# Altium PCB CAMERA-ESP32.PcbDoc
Units mil, origin at the board's own origin, x right, y up, seen from the top; angles counter-clockwise.
Board outline 1605 x 1090 mil, 2 copper layers (Top Layer, Bottom Layer); 35 components, 36 nets, 167 pads, 23 vias.
Unrouted connection lines stored in the file: 3.
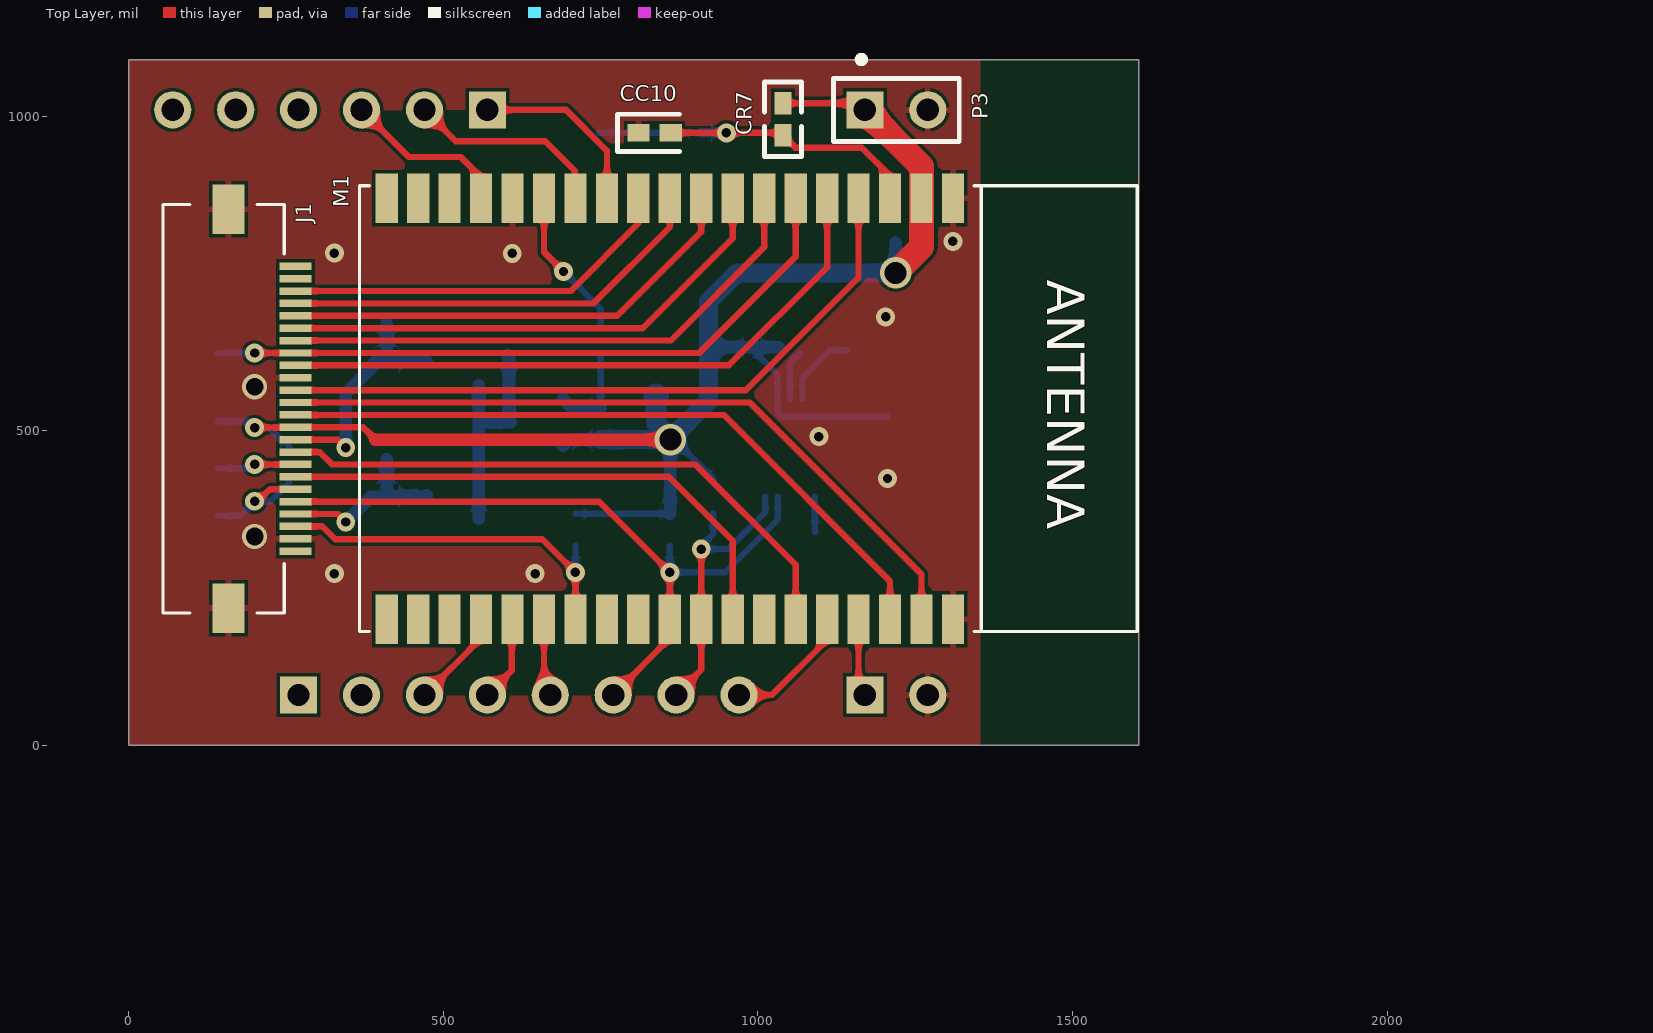
[diagram p0: Top Layer view]
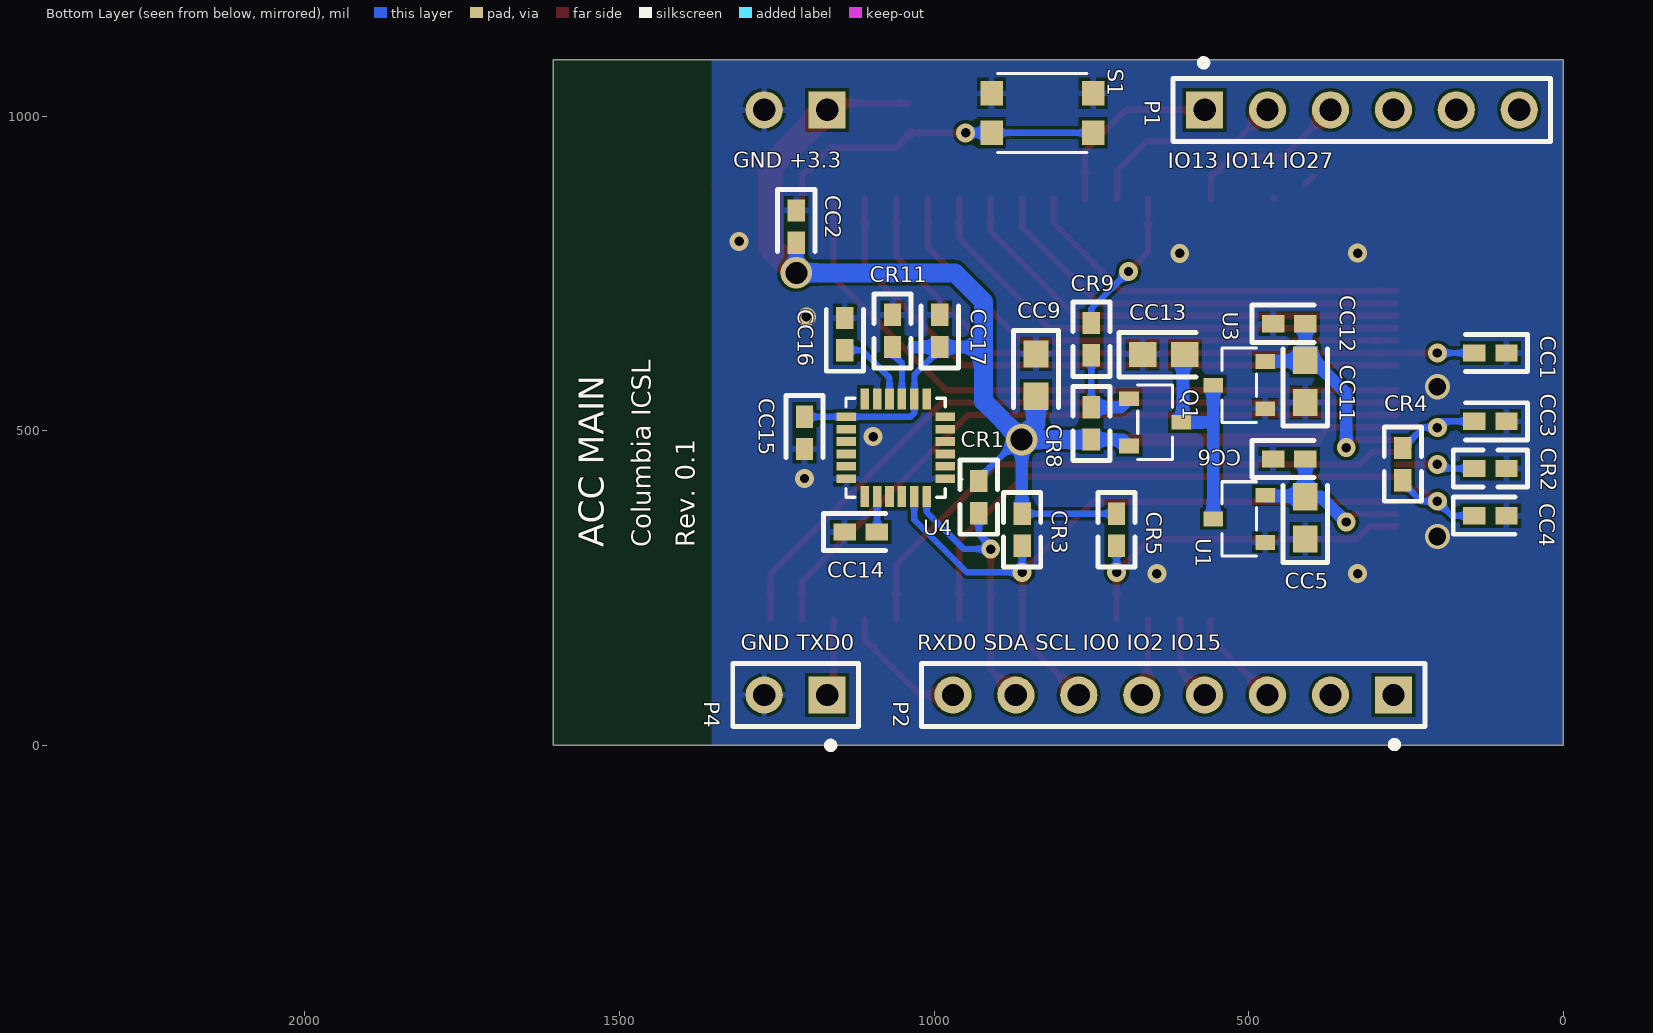
[diagram p1: Bottom Layer view, seen from below]

## Layer stack, top to bottom
Top Solder: solder mask 0.4, Solder Resist, Dk 3.5
Top Layer: signal copper 1.4
Dielectric 1: dielectric 12.6, FR-4, Dk 4.8
Bottom Layer: signal copper 1.4
Bottom Solder: solder mask 0.4, Solder Resist, Dk 3.5

## Board outline
0,0 1605,0 1605,1090 0,1090

## Design rules (kind name [scope] priority, off if disabled: settings)
Clearance [All] p1: gap=5 ignorepadtopadclearanceinfootprint=FALSE
PolygonConnect [All] p1: connectstyle=Relief reliefconductorwidth=10 reliefentries=4 polygonreliefangle="90 Angle" airgapwidth=5
RoutingVias [All] p1: holewidth=15 width=30 viastyle="Through Hole" minholewidth=15 minwidth=30 maxholewidth=40 maxwidth=60
SolderMaskExpansion [All] p1: expansion=4
Width [All] p1: maxlimit=40 minlimit=10 preferedwidth=20
30 further rules are at their usual default settings.

## Components (designator, comment, footprint, x,y, rotation, side; value= is the part's Value field where it differs from the comment)
CC1 "Cap Chip 0402" CC1005-0402 115.83,623.58 r0 bottom value=15pF
CC2 "Cap Chip 0402" CC1005-0402 1219,824.59 r270 bottom value=0.1uF
CC3 "Cap Chip 0402" CC1005-0402 115.83,515 r0 bottom value=0.1uF
CC4 "Cap Chip 0402" CC1005-0402 115.83,365 r180 bottom value=0.1uF
CC5 "Cap Chip 0603" CC1608-0603 410,361.54 r90 bottom value=10uF
CC6 "Cap Chip 0402" CC1005-0402 435.59,455 r180 bottom value=0.1uF
CC9 "Cap Chip 0603" CC1608-0603 838,588.46 r270 bottom value=10uF
CC10 "Cap Chip 0402" CC1005-0402 835.75,973.5 r0 top value=0.1uF
CC11 "Cap Chip 0603" CC1608-0603 410,578.46 r90 bottom value=10uF
CC12 "Cap Chip 0402" CC1005-0402 435.59,670 r180 bottom value=0.1uF
CC13 "Cap Chip 0603" CC1608-0603 635,621 r180 bottom value=10uF
CC14 "Cap Chip 0402" CC1005-0402 1116.59,339 r180 bottom value=2.2nF
CC15 "Cap Chip 0402" CC1005-0402 1206,496.62 r270 bottom value=0.1uF
CC16 "Cap Chip 0402" CC1005-0402 1141.83,653.59 r90 bottom value=0.1uF
CC17 "Cap Chip 0402" CC1005-0402 991,658.59 r90 bottom value=10nF
CR1 "Resistor Chip 0402" CR1005-0402 929,394.59 r90 bottom value=4.7K
CR2 "Resistor Chip 0402" CR1005-0402 115.83,440 r0 bottom value=1K
CR3 "Resistor Chip 0402" CR1005-0402 860,342.59 r270 bottom value=4.7K
CR4 "Resistor Chip 0402" CR1005-0402 255,447 r270 bottom value=4.7K
CR5 "Resistor Chip 0402" CR1005-0402 710,342.59 r270 bottom value=4.7K
CR7 "Resistor Chip 0402" CR1005-0402 1040,995 r90 top value=10K
CR8 "Resistor Chip 0402" CR1005-0402 750,511.59 r270 bottom value=10K
CR9 "Resistor Chip 0402" CR1005-0402 750,645.59 r270 bottom value=1K
CR11 "Resistor Chip 0402" CR1005-0402 1066,658.59 r90 bottom value=4.7K
J1 "CAM-FPC-CONNECTOR" CAM-CONNECTOR 239.41,535 r270 top
M1 "ESP32-WROVER-NO-PAD" ESP32-WROVER-NO-PAD 1354.88,535 r270 top
P1 "Header 6" HDR1X6 570,1010 r180 bottom
P2 "Header 8" HDR1X8 270,80 r0 bottom
P3 "Header 2" HDR1X2 1170,1010 r0 top
P4 "Header 2" HDR1X2 1170,80 r0 bottom
Q1 "P-MOS" PCBComponent_1 650.63,513.4 r270 bottom
S1 "KMR-6-SWITCH" KMR-6-SWITCH 827.87,1005 r0 bottom
U1 "XC6206-2.8V" XC6206-SOT-23 515,360 r90 bottom
U3 "XC6206-1.2V" XC6206-SOT-23 515,572.4 r90 bottom
U4 "MPU6050" MPU-6050 1061,473 r0 bottom

## Footprints (in the part's own frame and the unit in brackets; to place one, negate y for a bottom-side part, rotate by r counter-clockwise, add the part's x,y. Pads: shape width x height; smd on the part's side, far side on the other; paste and mask are expansions set on the pad)
CAM-CONNECTOR [mm]
  rect 0.3x1.3 smd: 1(-5.75,0.65) 2(-5.25,0.65) 3(-4.75,0.65) 4(-4.25,0.65) 5(-3.75,0.65) 6(-3.25,0.65) 7(-2.75,0.65) 8(-2.25,0.65) 9(-1.75,0.65) 10(-1.25,0.65) 11(-0.75,0.65) 12(-0.25,0.65) 13(0.25,0.65) 14(0.75,0.65) 15(1.25,0.65) 16(1.75,0.65) 17(2.25,0.65) 18(2.75,0.65) 19(3.25,0.65) 20(3.75,0.65) 21(4.25,0.65) 22(4.75,0.65) 23(5.25,0.65) 24(5.75,0.65)
  rect 2x1.3 smd: 25(-8.05,-2.05) 26(8.05,-2.05)
  silkscreen extent -8.25,-4.7 8.25,0.2
CC1005-0402 [mm]
  rect 0.9x0.7 smd: 1(-0.65,0) 2(0.65,0)
  silkscreen extent -1.5,-0.75 1,0.75, body extent -0.5,-0.25 0.5,0.25, height 0.3
CC1608-0603 [mm]
  rect 1.1x1 smd: 1(-0.85,0) 2(0.85,0)
  silkscreen extent -1.8,-0.9 1.3,0.9, body extent -0.8,-0.4 0.8,0.4, height 0.3
CR1005-0402 [mm]
  rect 0.9x0.7 smd: 1(-0.65,0) 2(0.65,0)
  silkscreen extent -1.5,-0.75 1.5,0.75, body extent -0.5,-0.25 0.5,0.25, height 0.35
ESP32-WROVER-NO-PAD [mm]
  rect 2x0.9 smd: 1(-8.5,-1.14) 2(-8.5,-2.41) 3(-8.5,-3.68) 4(-8.5,-4.95) 5(-8.5,-6.22) 6(-8.5,-7.49) 7(-8.5,-8.76) 8(-8.5,-10.03) 9(-8.5,-11.3) 10(-8.5,-12.57) 11(-8.5,-13.84) 12(-8.5,-15.11) 13(-8.5,-16.38) 14(-8.5,-17.65) 15(-8.5,-18.92) 16(-8.5,-20.19) 17(-8.5,-21.46) 18(-8.5,-22.73) 19(-8.5,-24) 20(8.5,-24) 21(8.5,-22.73) 22(8.5,-21.46) 23(8.5,-20.19) 24(8.5,-18.92) 25(8.5,-17.65) 26(8.5,-16.38) 27(8.5,-15.11) 28(8.5,-13.84) 29(8.5,-12.57) 30(8.5,-11.3) 31(8.5,-10.03) 32(8.5,-8.76) 33(8.5,-7.49) 34(8.5,-6.22) 35(8.5,-4.95) 36(8.5,-3.68) 37(8.5,-2.41) 38(8.5,-1.14)
  silkscreen extent -9,-25.1 9,6.3
HDR1X2 [mm] "Connector; Header; 2 Position"
  rect 1.5x1.5 hole 0.9: 1(0,0)
  round 1.5 hole 0.9: 2(2.54,0)
  silkscreen extent -1.27,-1.27 3.81,2.17, body extent -1.27,-1.27 3.81,1.27, height 8.54
HDR1X6 [mm] "Connector; Header; 6 Position"
  rect 1.5x1.5 hole 0.9: 1(0,0)
  round 1.5 hole 0.9: 2(2.54,0) 3(5.08,0) 4(7.62,0) 5(10.16,0) 6(12.7,0)
  silkscreen extent -1.27,-1.27 13.97,2.04, body extent -1.27,-1.27 13.97,1.27, height 8.54
HDR1X8 [mm] "Connector; Header; 8 Position"
  rect 1.5x1.5 hole 0.9: 1(0,0)
  round 1.5 hole 0.9: 2(2.54,0) 3(5.08,0) 4(7.62,0) 5(10.16,0) 6(12.7,0) 7(15.24,0) 8(17.78,0)
  silkscreen extent -1.27,-1.27 19.05,2.14, body extent -1.27,-1.27 19.05,1.27, height 8.54
KMR-6-SWITCH [mm]
  rect 0.9x1 smd: 1(-2.05,0.8) 1(2.05,0.8) 2(-2.05,-0.8) 2(2.05,-0.8)
  silkscreen extent -1.8,-1.6 1.8,1.6
MPU-6050 [mm]
  rect 0.8x0.35 smd: 1(-2,1.25) 2(-2,0.75) 3(-2,0.25) 4(-2,-0.25) 5(-2,-0.75) 6(-2,-1.25) 13(2,-1.25) 14(2,-0.75) 15(2,-0.25) 16(2,0.25) 17(2,0.75) 18(2,1.25)
  rect 0.35x0.85 smd: 7(-1.25,-1.975) 8(-0.75,-1.975) 9(-0.25,-1.975) 10(0.25,-1.975) 11(0.75,-1.975) 12(1.25,-1.975) 19(1.25,1.975) 20(0.75,1.975) 21(0.25,1.975) 22(-0.25,1.975) 23(-0.75,1.975) 24(-1.25,1.975)
  silkscreen extent -2.68,-2 2,2
PCBComponent_1 [mm]
  rect 0.6x0.8 smd: 1(-0.95,-1) 2(0.95,-1) 3(0,1.1)
  silkscreen extent -1.5,-0.65 1.5,0.75
XC6206-SOT-23 [mm]
  rect 0.6x0.8 smd: 1(-0.95,-1.05) 2(0.95,-1.05) 3(0,1.05)
  silkscreen extent -1.5,-0.7 1.5,0.7

## Part data
CC1 CC2 CC3 CC4 CC5 CC6 CC9 CC10 CC11 CC12 CC13 CC14 CC15 CC16 CC17: "Polarized Capacitor (Radial)", Published=8-Jun-2000, Publisher="Altium Limited", Revision="July-2002: Re-released for DXP Platform."
CR1 CR2 CR3 CR4 CR5 CR7 CR8 CR9 CR11: "Resistor", Published=8-Jun-2000, Publisher="Altium Limited", Revision="July-2002: Re-released for DXP Platform."
P1: "Header, 6-Pin", LatestRevisionDate=17-Jul-2002, LatestRevisionNote="Re-released for DXP Platform.", Publisher="Altium Limited"
P2: "Header, 8-Pin", LatestRevisionDate=17-Jul-2002, LatestRevisionNote="Re-released for DXP Platform.", Publisher="Altium Limited"
P3 P4: "Header, 2-Pin", LatestRevisionDate=17-Jul-2002, LatestRevisionNote="Re-released for DXP Platform.", Publisher="Altium Limited"
U1 U3: library part XC6206

## Via types
v1: diameter 30, hole 15, Top Layer to Bottom Layer, 19 vias
v2: diameter 50, hole 35, Top Layer to Bottom Layer, 2 vias
v3: diameter 40, hole 28, Top Layer to Bottom Layer, 2 vias

## Nets (pads, with @x,y where several pads share a name; then routed paths per layer and width w, separated by ;. In a path a pad name is that pad's centre, name@x,y a point inside that pad or via, vN(x,y) a via of type N, cw(c..) or ccw(c..) an arc to the next point about the centre after c; other vN are vias at no path point)
+1.2: CC11.2 CC12.2 J1.15 U3.2 | length 382.4
  Top Layer w10: J1.15@265.79,485 J1.15 332.32,485.79 v1(345,473.11)
  Bottom Layer w20: v1(345,473.11) 345,560 396.93,611.93 CC11.2 ; CC12.2 CC11.2 ; U3.2 472.6,610.87 411.06,610.87 CC11.2
+2.8: CC5.2 CC6.2 J1.21 U1.2 | length 291.5
  Top Layer w10: J1.21 332.32,367.68 v1(345,355)
  Bottom Layer w20: v1(345,355) 385,395 CC5.2 ; CC6.2 CC5.2 ; U1.2 472.46,396.2 411.2,396.2 CC5.2
+3.3: CC2.2 CC3.2 CC9.2 CC15.1 CC17.1 CR1.2 CR3.1 CR4.1 CR5.1 CR7.2 CR8.2 J1.14 M1.2 P3.1 Q1.2 U4.8 U4.13 | length 2893.9
  Top Layer w10: v1@200.24,505.24 264.76,505.24 J1.14 372.53,505.47 392.21,485.79 ; CR7.2 P3.1@1157.87,1020.59
  Top Layer w20: 392.21,485.79 v2@860.76,485.79
  Top Layer w35: P3.1@1157.87,1020.59 1168.46,1010 P3.1
  Top Layer w40: P3.1 1260,920 M1.2 1260,792 v2(1219,751)
  Bottom Layer w10: CC3.2 190,515 v1(200,505) ; v1@203.83,501.17 v1(200,505) ; CR4.1 255,476.53 246.22,485.31 242.28,485.31 222.59,505 v1(200,505) ; CR5.1 CR3.1 ; v2(860.76,486) 867.12,486 929,424.12 CR1.2 ; CC17.1 991,629.06 1031.24,588.83 1031.24,550.99 U4.8 1031.47,528.07 1037.33,522.21 U4.13 CC15.1
  Bottom Layer w20: Q1.2 700,486 CR8.2 ; CR3.1 860.38,368.56 860.38,485.62 v2(860.76,486) ; 921.31,633 CC17.1 1033,633 ; v2(1219,751) CC2.2
  Bottom Layer w30: CR8.2 v2(860.76,486) 921.31,546.55 921.31,633 921.31,705.31 967,751 v2(1219,751) ; CC9.2@838.31,554.69 838.31,511.15 v2@860.76,488.71
  Bottom Layer w40: CC9.2 CC9.2@838.31,554.69 ; v2(860.76,486) v2@860.76,488.71
GND: CC1.1 CC2.1 CC3.1 CC4.2 CC5.1 CC6.1 CC9.1 CC10.1 CC11.1 CC12.1 CC13.1 CC14.1 CC15.2 CC16.2 CC17.2 CR2.1 CR11.2 J1.10 J1.23 J1.25 J1.26 M1.1 M1.15 M1.38 P3.2 P4.2 S1.2 U1.1 U3.1 U4.1 U4.11 U4.18
  other v1: 327,273 646,273 1206,424.12 1097,490.58 1203,681 327,782.25 609.55,782 1310,801
  other v3: 200.16,332 200.16,570
NetCC1_2: CC1.2 J1.8 M1.6 | length 1074.8
  Top Layer w10: v1(200,623.58) J1.8 906.58,623.58 1060,777 M1.6
  Bottom Layer w10: CC1.2 v1(200,623.58)
NetCC4_1: CC4.1 CR4.2 J1.19 | length 212.1
  Top Layer w10: v1(200,388) 205.36,388 224.41,407.05 J1.19
  Bottom Layer w10: CC4.1 177,365 v1(200,388) 225.53,388 255,417.47 CR4.2
NetCC10_2: CC10.2 CR7.1 M1.3 S1.1 | length 615.2
  Top Layer w10: CC10.2 v1(950,973.5) CR7.1@1035.91,973.5 ; CR7.1 1059.41,950 1165,950 1210,905 M1.3
  Top Layer w15: CR7.1@1035.91,973.5 CR7.1
  Bottom Layer w10: S1.1@747.17,973.5 S1.1@908.58,973.5
  Bottom Layer w15: S1.1@908.58,973.5 v1(950,973.5)
NetCC13_2: CC13.2 Q1.3 U1.3 U3.3 | length 372.9
  Bottom Layer w20: U1.3 556.34,532.4 U3.3 ; 556.34,513.4 Q1.3@606.24,513.4 ; CC13.2 604.43,618.11 604.43,515.21 Q1.3@606.24,513.4 ; Q1.3 Q1.3@606.24,513.4
NetCC14_2: CC14.2 U4.20 | length 56.4
  Bottom Layer w10: U4.20 1090.53,339.47 CC14.2
NetCC16_1: CC16.1 U4.10 | length 122.7
  Bottom Layer w10: U4.10 1070.84,584.45 1114.39,628 CC16.1
NetCR1_1: CR1.1 M1.30 P2.7 U4.24 | length 464
  Top Layer w10: P2.7 910,120 M1.30 v1(910,312)
  Bottom Layer w10: CR1.1 928.87,368.87 928.87,335.55 910,316.68 v1(910,312) 953,312 1011.79,370.79 U4.24
NetCR2_2: CR2.2 J1.17 | length 126.2
  Top Layer w10: v1(200,446.42) J1.17
  Bottom Layer w10: CR2.2 193.58,440 v1(200,446.42)
NetCR3_2: CR3.2 J1.20 M1.29 P2.6 U4.23 | length 1158.6
  Top Layer w10: J1.20 747.64,387.36 v1(860,275) M1.29 860,170 P2.6
  Bottom Layer w10: CR3.2 v1(860,275) 948,275 1031.47,358.47 U4.23
NetCR5_2: CR5.2 J1.22 M1.26 | length 591.9
  Top Layer w10: J1.22 307.63,347.99 328.07,327.56 657.44,327.56 v1(710,275) M1.26
  Bottom Layer w10: v1(710,275) CR5.2
NetCR8_1: CR8.1 CR9.2 Q1.1 | length 148.5
  Bottom Layer w10: CR8.1 CR9.2
  Bottom Layer w20: Q1.1 703.62,537.18 CR8.1
NetCR9_1: CR9.1 M1.14 | length 235.7
  Top Layer w10: M1.14 660,784.12 v1(691,753.12)
  Bottom Layer w10: v1(691,753.12) 750,694.12 CR9.1
NetCR11_1: CR11.1 U4.9 | length 78.7
  Bottom Layer w10: U4.9 1051.16,607.33 CR11.1@1066.83,623
NetJ1_3: J1.3 M1.11 | length 629.6
  Top Layer w10: J1.3 702.38,722.01 810,829.63 M1.11
NetJ1_4: J1.4 M1.10 | length 691.2
  Top Layer w10: J1.4 738.63,702.32 860,823.69 M1.10
NetJ1_5: J1.5 M1.9 | length 753.9
  Top Layer w10: J1.5 776.64,682.64 910,816 M1.9
NetJ1_6: J1.6 M1.8 | length 817.9
  Top Layer w10: J1.6 816.95,662.95 960,806 M1.8
NetJ1_7: J1.7 M1.7 | length 884.3
  Top Layer w10: J1.7 861.27,643.27 1010,792 M1.7
NetJ1_9: J1.9 M1.5 | length 1019.3
  Top Layer w10: J1.9 953.9,603.9 1110,760 M1.5
NetJ1_11: J1.11 M1.4 | length 1095
  Top Layer w10: J1.11 980.57,564.53 1160,743.95 M1.4
NetJ1_12: J1.12 M1.37 | length 1179.7
  Top Layer w10: J1.12 987.25,544.84 1260,272.09 M1.37
NetJ1_13: J1.13 M1.36 | length 1115.1
  Top Layer w10: J1.13 945.84,525.16 1210,261 M1.36
NetJ1_16: J1.16 M1.33 | length 955.8
  Top Layer w10: J1.16 303.9,466.1 323.58,446.42 900.48,446.42 1060,286.9 M1.33
NetJ1_18: J1.18 M1.31 | length 861.8
  Top Layer w10: J1.18 858.27,426.73 960,325 M1.31
NetM1_12: M1.12 P1.1 | length 292.3
  Top Layer w10: P1.1 695,1010 760,945 M1.12
NetM1_13: M1.13 P1.2 | length 322.9
  Top Layer w10: P1.2 520,960 662,960 709,913 709,870.65 M1.13
NetM1_16: M1.16 P1.3 | length 267.7
  Top Layer w10: P1.3 445,935 528,935 560,903 M1.16
NetM1_23: M1.23 P2.3 | length 158.5
  Top Layer w10: P2.3 561,171 561,199.35 M1.23
NetM1_24: M1.24 P2.4 | length 136.9
  Top Layer w10: P2.4 609,119 609,199.35 M1.24
NetM1_25: M1.25 P2.5 | length 124.5
  Top Layer w10: M1.25 660,90 P2.5
NetM1_34: M1.34 P2.8 | length 208.9
  Top Layer w10: P2.8 1022.21,80 1110,167.79 M1.34
NetM1_35: M1.35 P4.1 | length 125.7
  Top Layer w10: M1.35 1160,90 P4.1
  Bottom Layer w40: P4.1 P4.1@1170.83,80.83
pads on no net: J1.1 J1.2 J1.24 M1.17 M1.18 M1.19 M1.20 M1.21 M1.22 M1.27 M1.28 M1.32 P1.4 P1.5 P1.6 P2.1 P2.2 U4.2 U4.3 U4.4 U4.5 U4.6 U4.7 U4.12 U4.14 U4.15 U4.16 U4.17 U4.19 U4.21 U4.22
copper on no net: | length 19.5
  Top Layer w10: 397.28,904.02 410,891.3 ; 458.91,870.73 460,869.65

## Polygon pours and split planes (outlines as drawn)
GND on Bottom Layer "Bottom Layer-GND" (solid, remove dead copper, pour order 14): 0,1090 0,0 1353,0 1353,1090
GND on Top Layer "Top Layer-GND" (solid, remove dead copper, pour order 16): 0,1090 0,0 1353,0 1353,1090

## Keep-outs
Keep-Out Layer:
  region: 1355,890

## Other copper
Top Layer:
  pour cut-out: 1219.23,744 1218.23,743 1169.77,743 1169.77,754.55 1172.23,757 1173.23,756 1211.89,756
  pour cut-out: 470,80 970,80 970,90.82 972.18,93 971.18,94 469.7,94
  pour cut-out: 291,599 291,570 295.59,574.59 295.59,593.7
  pour cut-out: 441.01,930.22 691.78,932.19 691.78,909.39 689.95,907.56 441.45,907.56
  pour cut-out: 403.48,1008.95 537.28,1010 537.28,987.2 535.45,985.37 403.94,985.37
  pour cut-out: 766,956.22 766,910 842.13,910 842.13,956.22
  pour cut-out: -75,-365
  region: 2355,1050
Bottom Layer:
  pour cut-out: 977.26,411.9 987.26,411.9 987.26,418.79 977.26,418.79
  pour cut-out: 961.51,428.79 961.51,418.79 967,418.79 967,428.82

## Silkscreen, mask and mechanical layers (free items; w line width, h text height)
Bottom Overlay:
  text "GND +3.3" at 1319,918 h25
  text "IO13 IO14 IO27" at 628.3,917 h25
  text "Rev. 0.1" at 1380,315 h30 r270
  text "Columbia ICSL" at 1450,315 h30 r270
  text "ACC MAIN" at 1525,315 h40 r270
  text "RXD0 SDA SCL IO0 IO2 IO15" at 1027,151 h25
  text "GND TXD0" at 1307,151 h25
Mechanical 1:
  the board outline again, w5

## Text inside footprints (layer, text, board x,y; h text height)
M1: Top Overlay "ANTENNA" at 1460,740 h60 r270